# Altium PCB Rackmount_DSP.PcbDoc (part 24 of 24)
Units mil, origin at the board's own origin, x right, y up, seen from the top; angles counter-clockwise.
Board outline 10629.92 x 8267.72 mil, 4 copper layers (Top Layer, Mid Layer 1, Mid Layer 2, Bottom Layer), stack 36.2 mil thick; 4500 components, 1565 nets, 9765 pads, 3289 vias.
Unrouted connection lines stored in the file: 1.
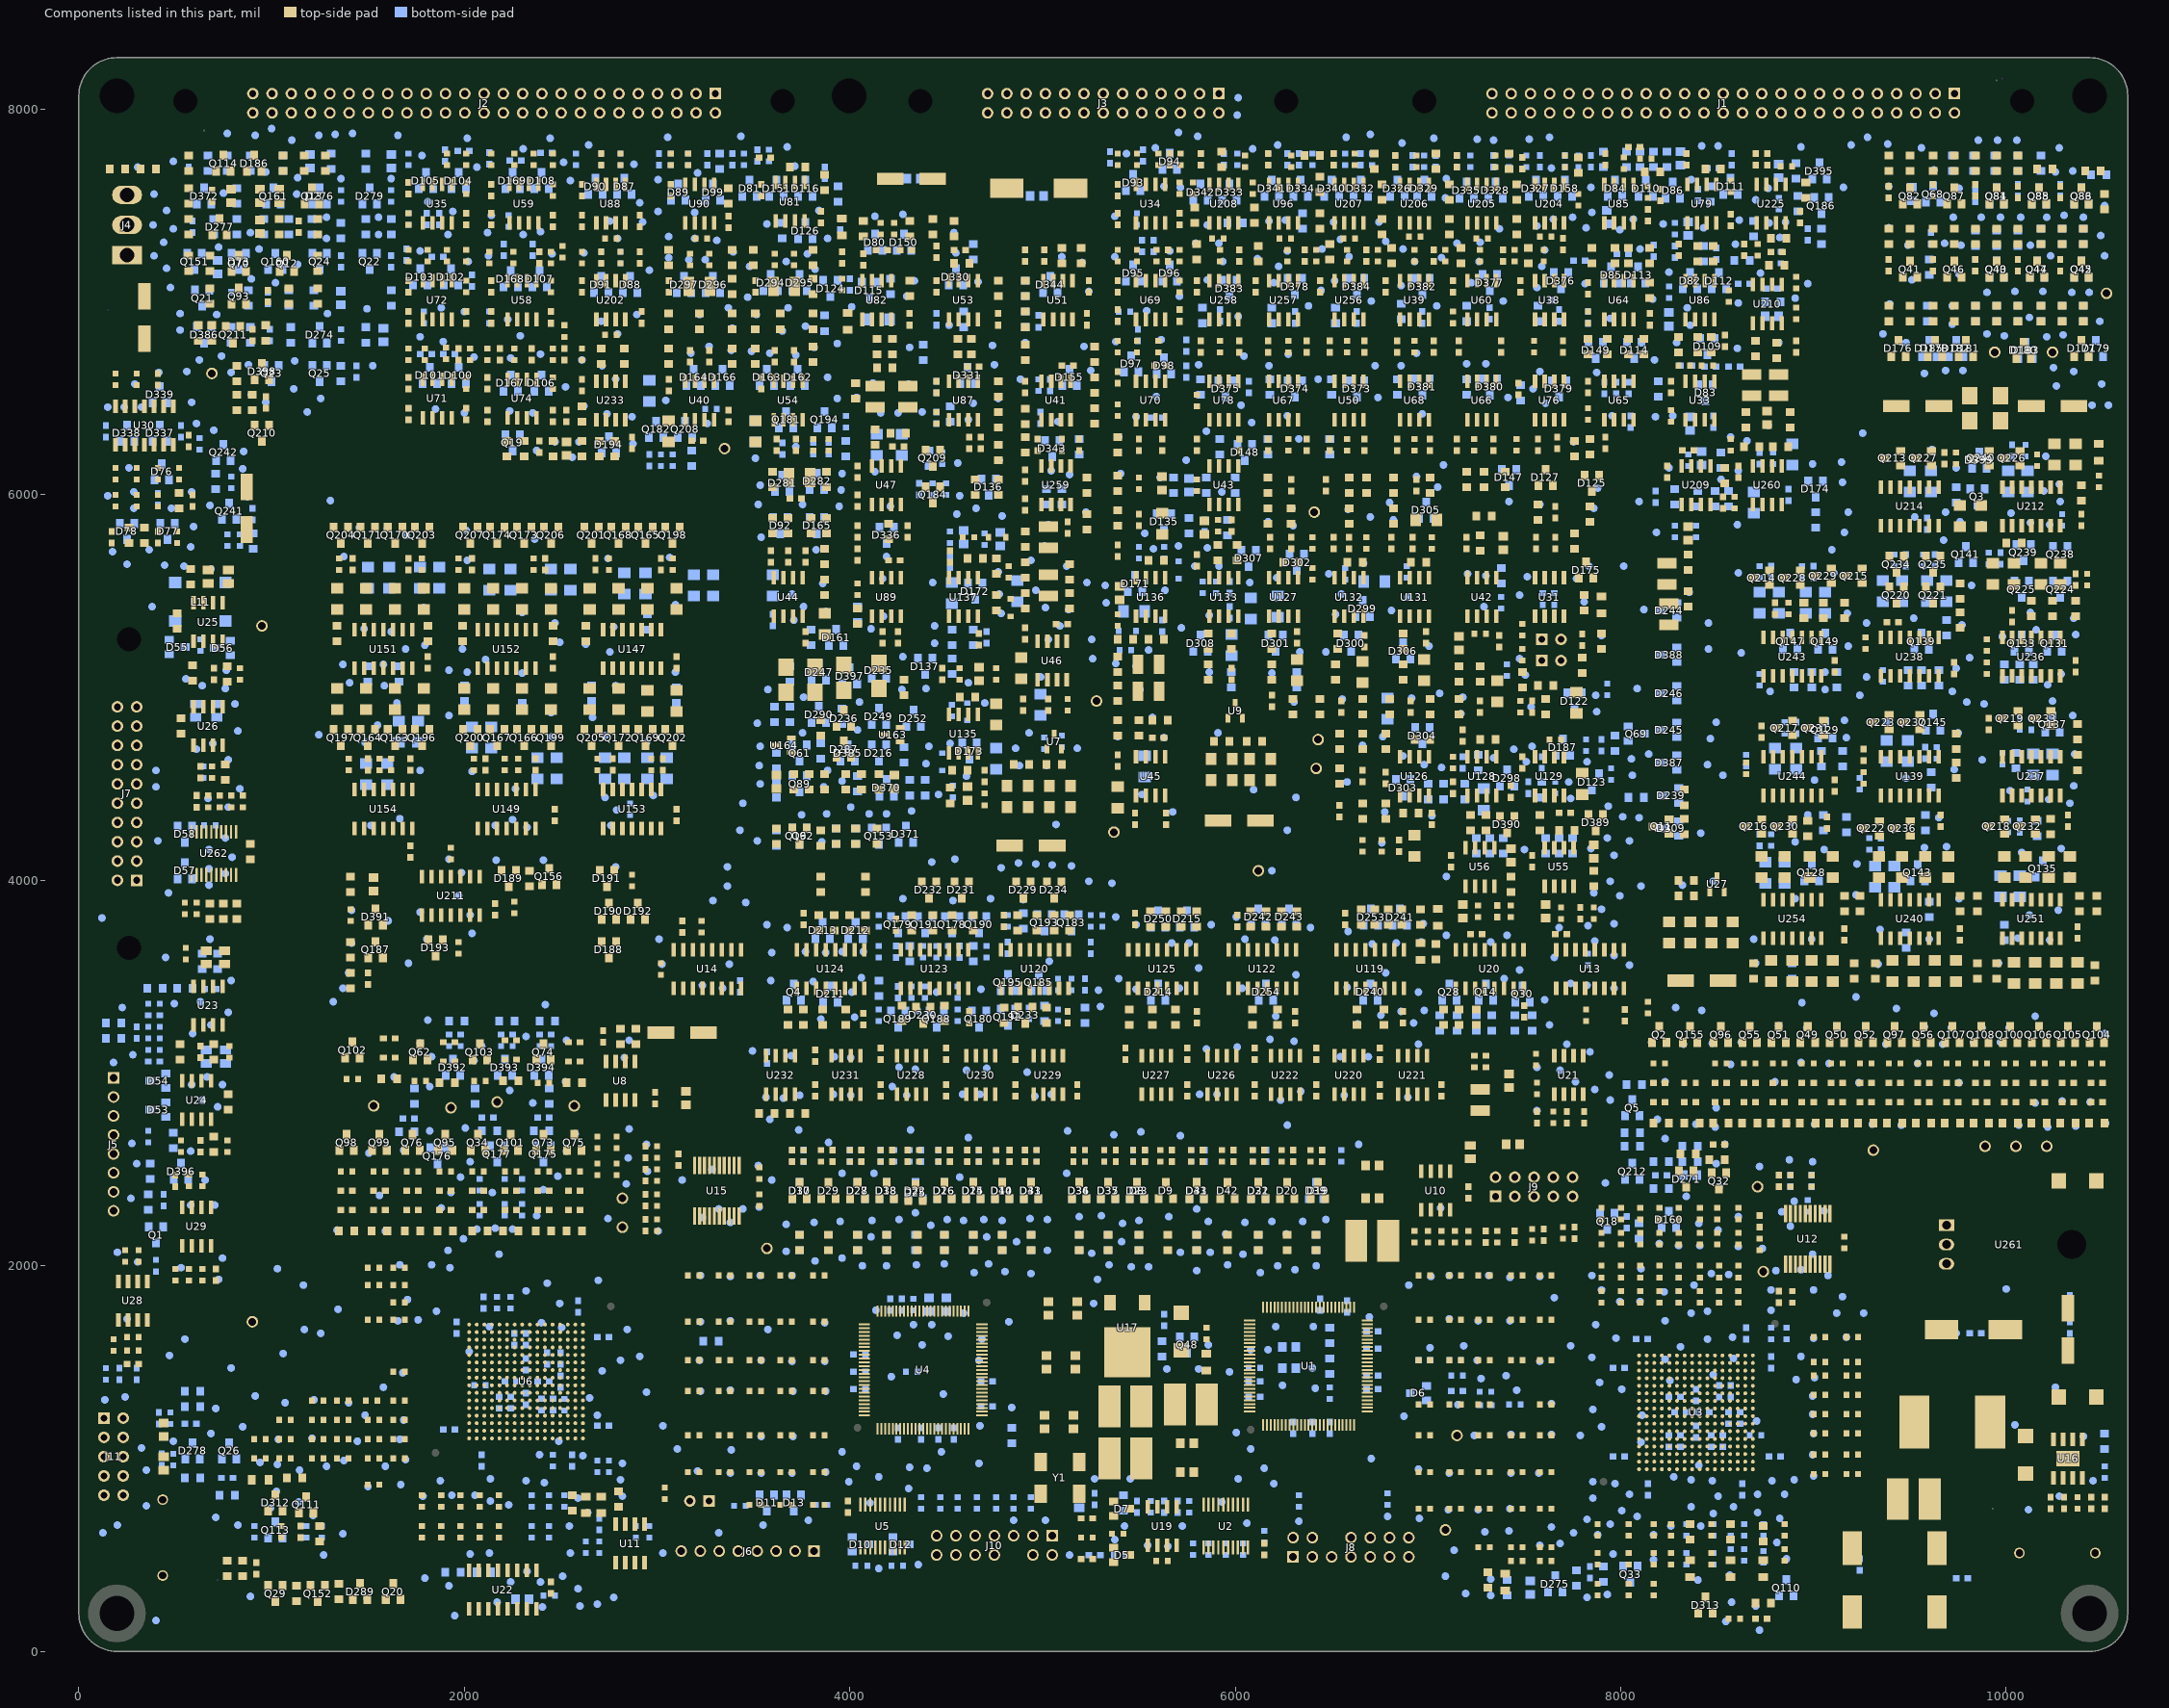
[diagram p26: the components of this part, seen from the top]

## Polygon pours and split planes (outlines as drawn) (continued)
VCC15+ on Mid Layer 2 "Mid Layer 2-VCC15+ 3" (solid, remove dead copper, pour order 67): 200 vertices, not listed, extent 140,3300 9000,7880
VCC15- on Mid Layer 2 "Mid Layer 2-VCC15-" (solid, remove dead copper, pour order 60): 5560,4080 5620,4020 6940,4020 7220,4300 7580,4300 7640,4240 7640,4120 7720,4040 8620,4040 8640,4020 8640,3600 8040,3000 3500,3000 3460,3040 3460,3140 3480,3160 7280,3160 7360,3240 8060,3240 8280,3460 8280,3780 8180,3880 5460,3880 5460,4100 5560,4100
VCC15- on Mid Layer 2 "Mid Layer 2-VCC15- 1" (solid, remove dead copper, pour order 66): 211 vertices, not listed, extent 1580,3880 9180,8160
+5V on Mid Layer 2 "Mid Layer 2-+5V" (solid, remove dead copper, pour order 61): 3080,3580 8220,3580 8240,3560 8240,3460 8040,3260 7360,3260 7280,3180 3060,3180 3020,3220 3020,3520
+5V on Mid Layer 2 "Mid Layer 2-+5V 1" (solid, remove dead copper, pour order 64): 940,7340 960,7320 960,7045 955,7040 725,7040 700,7015 700,6860 1160,6400 1160,2590 1150,2580 370,2580 360,2590 360,2870 370,2880 520,2880 530,2890 530,3260 520,3270 110,3270 100,3280 100,6680 140,6720 600,6720 620,6740 620,6980 560,7040 560,7300 600,7340
-5V on Mid Layer 2 "Mid Layer 2--5V" (solid, remove dead copper, pour order 58): 8240,3620 8260,3640 8260,3760 8160,3860 3080,3860 3020,3800 3020,3660 3060,3620
+1.8V on Mid Layer 2 "Mid Layer 2-+1.8V" (solid, remove dead copper, pour order 59): 4080,1520 4160,1520 4180,1500 4180,1410 4170,1400 4120,1400 4100,1380 4100,1300 4120,1280 4290,1280 4310,1260 4310,1190 4330,1170 4490,1170 4510,1190 4510,1330 4530,1350 5300,1350 5320,1330 5320,820 5350,790 5470,790 5630,950 5630,1120 5620,1130 5570,1130 5560,1140 5560,1360 5570,1370 6190,1370 6260,1300 6260,1220 6280,1200 6340,1200 6350,1210 6350,1290 6370,1310 6430,1310 6440,1300 6440,1210 6460,1190 6540,1190 6560,1210 6560,1400 6580,1420 6670,1420 6690,1440 6690,1590 6670,1610 6520,1610 6500,1630 6500,1730 6470,1760 6070,1760 5960,1650 5780,1650 5690,1740 5370,1740 5190,1920 4280,1920 4240,1880 4240,1670 4230,1660 4080,1660 4060,1640 4060,1540
GND on Bottom Layer "Bottom Layer-GND" (solid, remove dead copper, pour order 69): 9040,7840 9040,6080 8360,6080 8360,3280 7840,2760 3280,2760 3280,6040 3240,6080 2365,6080 2320,6125 2320,6160 1680,6160 1680,7800 3700,7800 3780,7720 4220,7720 4240,7700 4240,7440 4600,7440 4640,7400 4640,7280 4680,7240 5240,7240 5280,7280 5280,8120 5920,8120 5920,7920 8960,7920
GND on Bottom Layer "Bottom Layer-GND 1" (solid, remove dead copper, pour order 37): 4900,7740 4900,7340 4880,7320 4720,7320 4700,7340 4700,7740 4720,7760 4880,7760
GND on Bottom Layer "Bottom Layer-GND 2" (solid, remove dead copper, pour order 63): 9020,100 9060,60 9830,60 10100,330 10100,650 10170,720 10560,720 10580,740 10580,2300 10540,2340 9660,2340 9540,2220 9540,1260 9360,1080 9360,900 9300,840 9040,840 9020,820
VCC15+ on Bottom Layer "Bottom Layer-VCC15+" (solid, remove dead copper, pour order 32): 5040,7760 5040,7360 5080,7320 5140,7320 5220,7400 5220,7760 5200,7780 5060,7780
VCC15- on Bottom Layer "Bottom Layer-VCC15-" (solid, remove dead copper, pour order 25): 4400,7800 4400,7540 4440,7500 4560,7500 4580,7520 4580,7800 4560,7820 4420,7820
PGND on Bottom Layer "Bottom Layer-PGND" (solid, remove dead copper, pour order 49): 110,430 470,430 500,400 500,130 430,60 120,60 60,120 60,380
PGND on Bottom Layer "Bottom Layer-PGND 1" (solid, remove dead copper, pour order 45): 10390,410 10390,520 10430,560 10560,560 10580,540 10580,140 10480,40 10320,40 10280,80 10280,300

## Other copper
Top Layer:
  region net PGND: 420,230 450,230 450,400 420,400
  region net PGND: 10450,420 10480,420 10480,520 10450,520
Mid Layer 1:
  pour cut-out: 3772.98,8045 ccw(c3650,8045) 3650,8167.98 ccw(c3650,8045) 3527.02,8045 ccw(c3650,8045) 3650,7922.02 ccw(c3650,8045)
  pour cut-out: 4487.98,8040 ccw(c4365,8040) 4365,8162.98 ccw(c4365,8040) 4242.02,8040 ccw(c4365,8040) 4365,7917.02 ccw(c4365,8040)
  pour cut-out: 4165,8070 ccw(c4000,8070) 4000,8235 ccw(c4000,8070) 3835,8070 ccw(c4000,8070) 4000,7905 ccw(c4000,8070)
  pour cut-out: 6387.98,8035 ccw(c6265,8035) 6265,8157.98 ccw(c6265,8035) 6142.02,8035 ccw(c6265,8035) 6265,7912.02 ccw(c6265,8035)
  pour cut-out: 7107.98,8040 ccw(c6985,8040) 6985,8162.98 ccw(c6985,8040) 6862.02,8040 ccw(c6985,8040) 6985,7917.02 ccw(c6985,8040)
  pour cut-out: 382.98,5245 ccw(c260,5245) 260,5367.98 ccw(c260,5245) 137.02,5245 ccw(c260,5245) 260,5122.02 ccw(c260,5245)
  pour cut-out: 382.98,3650 ccw(c260,3650) 260,3772.98 ccw(c260,3650) 137.02,3650 ccw(c260,3650) 260,3527.02 ccw(c260,3650)
Mid Layer 2:
  pour cut-out: 4197.99,8060 ccw(c4000,8060) 4000,8257.99 ccw(c4000,8060) 3802.01,8060 ccw(c4000,8060) 4000,7862.01 ccw(c4000,8060)
Bottom Layer:
  pour cut-out: 9190,380 9280,380 9280,530 9190,530
  pour cut-out: 9700,340 9840,340 9840,420 9700,420

## Silkscreen, mask and mechanical layers (free items; w line width, h text height)
Top Overlay:
  drawing of 158 lines, arcs and shapes, not listed
  text "H2" at 10498.44,7882.5 h50
  text "H4" at 79.58,7842.5 h50
  text "H3" at 3985.94,7780 h50
  text "INV" at 1617.15,7745 h70
  text "REC" at 9107.11,7740 h70
  text "-15V" at 18.07,7652.5 h40
  text "+15V" at 51.33,7075 h50
  text "GND" at 10551.33,6874.91 h35 r90
  text "GND" at 3320,6115 h35
  text "BAT NUM" at 7969.7,5051.37 h35
  text "J16" at 8194.89,5051.37 h35
  text "J17" at 8304.89,5051.37 h35
  text "15" at 8101.56,4981.37 h35
  text "**" at 8313.66,4968.87 h50
  text "**" at 8206.16,4966.37 h50
  text "---" at 8306.11,4901.37 h35
  text "16" at 8116.56,4898.87 h35
  text "**" at 8208.66,4891.37 h50
  text "18" at 8116.56,4818.87 h35
  text "17" at 8019.06,4816.37 h35
  text "---" at 8203.61,4816.37 h35
  text "**" at 8313.66,4808.87 h50
  text "---" at 8201.11,4746.37 h35
  text "---" at 8308.61,4743.87 h35
  text "20" at 8114.67,4738.87 h35
  text "19" at 8019.06,4736.37 h35
  text "PARALLEL" at 503.4,4306.65 h35 r90
  text "REC JTAG" at 7718.77,2537.27 h35
  text "GND" at 9270,2475 h30
  text "MONITOR" at 363.4,2409.99 h35 r90
  text "GND" at 845,1585 h35
  text "SERVICE" at 3168.72,677.27 h35
  text "INV JTAG" at 82.08,627.27 h35
  text "INV_B" at 2628.4,420.37 h35 r90
  text "INV_A" at 2713.4,413.86 h35 r90
  text "H5" at 140.94,412.5 h50
  text "INV DSP JTAG" at 4629.14,362.27 h35
  text "REC DSP JTAG" at 6530.67,362.27 h35
  text "REC_A" at 8663.63,341.06 h35 r90
  text "DEBUG" at 3389.24,332.27 h35
  text "H1" at 10083.64,182.5 h50
  text "REC_B" at 8298.63,177.57 h35 r90
  text "BAR CODE" at 6074.95,157.5 h60
  text "IV0050U3" at 2870,125 h100
Bottom Overlay:
  region: 7835,7945 7816.25,7907.5 7846.25,7907.5
  region: 8830,7937.5 8811.25,7900 8841.25,7900
  region: 2402.5,7946 2383.75,7908.5 2413.75,7908.5
  region: 1405.53,7943.32 1386.78,7905.82 1416.78,7905.82
  lines w4: 255,3130 275,3150 ; 2375,1435 2380,1430 2380,1485 ; 2380,1205 2390,1215 2390,1160 ; 3915,6175 3950,6140 4005,6140 4020,6125 ; 4140,3700 4110,3700 4110,3535 4750,3535 4750,3700 4750,3875 4760,3895 4760,3940 4740,3960 ; 4325,3360 4325,3290 4355,3260 4355,3230 ; 8255,2590 8265,2580 8265,2700 ; 9465,5360 9530,5400 ; 9685,4685 9675,4675 9730,4675 ; 9865,4330 9970,4330 9960,4340 ; 9865,7075 9880,7085 10085,7085 10090,7090 ; 9875,4560 10015,4560 10005,4550 ; 4235,3935 4735,3935 4735,4085 4235,4085 4235,3935
  lines w5: 4340,4400 4365,4340 ; 6410,7515 6430,7490 ; 8425,685 8445,670 ; 8485,770 8570,725 8570,695
  lines w6: 1386.25,7618.75 1406.25,7626.25 ; 1400,7320 1407.5,7300 ; 6982.5,1430 7030,1430 7075,1415 7080,1415 ; 7345,1392.5 7345,1522.5 ; 8132.5,1330 8145,1337.5 8215,1337.5 ; 8355,6600 8405,6635 ; 8432.5,1430 8447.5,1417.5 8447.5,1277.5 ; 8510,1417.5 8525,1432.5 8525,1492.5 ; 8520,5335 8660,5335 8645,5350 ; 8770,7620 8805,7585 ; 8895,5540 8910,5525 ; 8895,7400 8895,7435 ; 10285,6787.5 10285,6857.5
Top Solder:
  region: 9860,1920 10460,1920 10460,2300 9860,2300
Top Assembly:
  region: 7665,683.64 7710,706.14 7710,661.14
  region: 8055.35,683.64 8010.35,661.14 8010.35,706.14
  lines w8: 7665,663.64 7665,935 ; 7687.5,683.64 7707.73,683.64 ; 8012.62,683.64 8032.85,683.64 ; 8055.35,663.64 8055.35,885.35
  text "9.91mm" at 7736.47,658.64 h50
Manufacture_Dimension:
  region: -443.15,0 -465.59,44.88 -420.71,44.88
  region: -443.15,8267.72 -420.71,8222.84 -465.59,8222.84
  region: 0,8858.27 44.88,8880.71 44.88,8835.83
  region: 10629.92,8858.27 10585.04,8835.83 10585.04,8880.71
  region: -1141.73,8464.57 -1119.29,8419.68 -1164.17,8419.68
  region: -1141.73,-196.85 -1164.17,-151.97 -1119.29,-151.97
  region: 10336.79,8436.94 10288.98,8452.18 10320.3,8484.33
  lines w7.87: -1161.81,-196.85 373.62,-196.85 ; -1161.81,8464.57 373.62,8464.57 ; -1141.73,-174.41 -1141.73,2962.52 ; -1141.73,5305.2 -1141.73,8442.13 ; -463.23,0 176.77,0 ; -463.23,8267.72 176.77,8267.72 ; -443.15,22.44 -443.15,3734.23 ; -443.15,4533.49 -443.15,8245.28 ; 0,8090.94 0,8878.35 ; 22.44,8858.27 4143.62,8858.27 ; 6486.3,8858.27 10607.48,8858.27 ; 10094.31,8673.16 10320.72,8452.6 ; 10629.92,8090.94 10629.92,8878.35
  text "270mm +0.2 - 0.2" at 4220.52,8779.53 h157.48
  text "R 5mm" at 9403.21,8594.42 h157.48
  text "ALL-" at 8895.67,8582.68 h157.48
  text "210mm" at -364.41,3817.3 h157.48 r90
  text "220mm +0.2 - 0.2" at -1062.99,3039.42 h157.48 r90
Board_Standard:
  drawing of 394 lines, arcs and shapes, not listed
  text "V-CUT" at 476.38,8300 h60
  text "V-CUT" at 346.38,-160 h60
  text "A00" at 5762.54,-1101.1 h100
  text "******" at 6446.35,-1113.6 h100
  text "IV0050U3" at 8645.55,-1201.1 h150
  text "Rev" at 5766.15,-1301.1 h100
  text "Modify No:" at 6348.86,-1301.1 h100
  text "Date" at 7331.91,-1301.1 h100
  text "IV0050U3 JY" at 10795.35,-1301.1 h150
  text "Technical Specification" at 7999.07,-1451.1 h150
  text "Designer" at 5599.63,-1676.1 h100
  text "Page" at 10427.9,-1676.1 h100
  text "02" at 11007.55,-1676.1 h100
  text "Of" at 11557.53,-1676.1 h100
  text "02" at 12057.55,-1676.1 h100
  text "Item Code" at 8721.7,-1701.1 h100
  text "Normalizer" at 5534.21,-1901.1 h100
  text "Approver" at 5580.66,-2076.1 h100
Technical_Specification:
  drawing of 347 lines, arcs and shapes, not listed
  text "1.GENERAL" at -14700,8920 h60
  text "a. Technical requirements are prioritized as follows:" at -14500,8820 h60
  text "1. First priority is given to this document;" at -14300,8720 h60
  text "2. Relevant contract documents agreed on by both parties;" at -14300,8620 h60
  text "3. The Bill Of General PCB Specification Document DMBM0.001.002G;" at -14300,8520 h60
  text "4. PCB general performance specification IPC-6012;" at -14300,8420 h60
  text "5. PCB acceptance specification IPC-A-600." at -14300,8320 h60
  text "b. Drill boards using drill data, drill pattern and hole schedule. Any conflict between the CAD data, the drawing," at -14500,8220 h60
  text "& the drill pattern shall be clarified with the design.authority before proceeding." at -14400,8120 h60
  text "c. Compensation and scaling may be applied by the PCB fabricator to allow for manufacturing process tolerances." at -14500,8020 h60
  text "d. All units of measure are in millimetres unless otherwise stated." at -14500,7920 h60
  text "2.ENGINEERING PROCESSING" at -14700,7720 h60
  text "a. If there isn't enough NPTH in the PCB for fabrication positioning, it is allowed to add NPTH positioning holes with diameter not greater than 3mm on the auxiliary process edges" at -14500,7620 h60
  text "(without affecting the SMT reference point) at the positions vacancies should be milled without break(which should be removed after finishing the PCB fabrication)." at -14400,7520 h60
  text "b. If positions vacancies should be milled without break (which should be removed after finishing the PCB fabrication)in the PCB, current-hogging sheet copper may be added there." at -14500,7420 h60
  text "c. When fabricating multi-layer PCBs, if auxiliary process edge exits, it is allowed to add choked-flow pieces (inner layer) and auxiliary electroplate pieces (outer layer) there." at -14500,7320 h60
  text "d. To ensure the size of the PCB with process edges,when milling troughs,the milling cutter milling in dummg strip a half of milling cutter diameter is permitted." at -14500,7220 h60
  text "e. The via without soldermask window should be treated as plugged." at -14500,7120 h60
  text "f. All for detail of those items beginning with \"#\" ,please refer to DMBM0.001.002G of Emerson Network Power Co.,Ltd." at -14500,7020 h60
  text "3.PARAMETERS" at -14700,6820 h60
  text "PCB Name:  IV0050U3" at -14500,6720 h60
  text "SPEll:  1  X  1" at -12800,6720 h60
  text "# PCB Material:(LM001)" at -11100,6720 h60
  text "# TG: (TG001)" at -9400,6720 h60
  text "Silkscreen color: WHITE" at -14500,6620 h60
  text "Electrical test: YES" at -12800,6620 h60
  text "# Surface Finishing: (PF003)" at -11100,6620 h60
  text "# CTI: (CTI001)" at -9400,6620 h60
  text "Blind or Buried via: NO" at -14500,6520 h60
  text "Plate at board edge:NO" at -12800,6520 h60
  text "# Soldermask Color: (SM001)" at -11100,6520 h60
  text "# SILKSCREEN MARK: (SS002)" at -9400,6520 h60
  text "V - CUT: YES" at -14500,6420 h60
  text "Gold finger: NO" at -12800,6420 h60
  text "# Green Technology: (GT002)" at -11100,6420 h60
  text "Copper thickness of plated via,though hole or edge >= 25um" at -14500,6320 h60
  text "4.VIEW" at -14700,6120 h60
  text "Arrangement of layers" at -14200,5920 h60
  text "(Dielectric strength: 2KV)" at -13300,5920 h60
  text "Width:" at -10674.04,5899.82 h60
  text "0.5mm" at -10425,5895 h60
  text "+/-0.15mm" at -10425,5820 h60
  text "TOP" at -14300,5720 h60
  text "1OZ" at -12600,5720 h60
  text "45" at -10980.88,5692.75 h60
  text "Core/Pre-preg >=0.4mm" at -13775,5620 h60
  text "+/-0.15mm" at -10675,5545 h60
  text "L2_INNER" at -14300,5520 h60
  text "1OZ" at -12600,5520 h60
  text "Core/Pre-preg >=0.4mm" at -13775,5420 h60
  text "L3_INNER" at -14300,5320 h60
  text "1OZ" at -12600,5320 h60
  text "Figure 2: V-CUT" at -10800,5320 h60
  text "Core/Pre-preg >=0.4mm" at -13775,5220 h60
  text "BOTTOM" at -14300,5120 h60
  text "1OZ" at -12600,5120 h60
  text "FINISHED BOARD THICKNESS:" at -14200,4920 h60
  text "2.0mm +/-0.18mm" at -13000,4920 h60
  text "Figure 1: Arrangement of layers" at -13900,4720 h60
  text "LAYER" at -14400,4470 h60
  text "Gerber files" at -13500,4470 h60
  text "NOTES" at -12400,4470 h60
  text "TOP" at -14400,4320 h60
  text "EtchLayer1Top.gdo" at -13500,4320 h60
  text "Positive" at -12400,4320 h60
  text "L2_INNER" at -14400,4220 h60
  text "EtchLayer2.gdo" at -13500,4220 h60
  text "Positive" at -12400,4220 h60
  text "L3_INNER" at -14400,4120 h60
  text "EtchLayer3.gdo" at -13500,4120 h60
  text "Positive" at -12400,4120 h60
  text "BOTTOM" at -14400,4020 h60
  text "EtchLayer4Bottom.gdo" at -13500,4020 h60
  text "Positive" at -12400,4020 h60
  text "SilkscreenTop" at -14400,3920 h60
  text "SilkscreenTop.gdo" at -13500,3920 h60
  text "Positive" at -12400,3920 h60
  text "SilkscreenBottom" at -14400,3820 h60
  text "SilkscreenBottom.gdo" at -13500,3820 h60
  text "Positive" at -12400,3820 h60
  text "SoldermaskTop" at -14400,3720 h60
  text "SoldermaskTop.gdo" at -13500,3720 h60
  text "Negative" at -12400,3720 h60
  text "SoldermaskBottom" at -14400,3620 h60
  text "SoldermaskBottom.gdo" at -13500,3620 h60
  text "Negative" at -12400,3620 h60
  text "DrillDrawingThrough" at -14400,3520 h60
  text "DrillDrawingThrough.gdo" at -13500,3520 h60
  text "TechnicalSpecification" at -14400,3420 h60
  text "TechnicalSpecification.gdo" at -13500,3420 h60
  text "NC DRILL" at -14400,3320 h60
  text "Thruholeplated.ncd" at -13500,3320 h60
  text "DRILL" at -12400,3320 h60
  text "Thruholenonplate.ncd" at -13500,3220 h60
  text "DRILL" at -12400,3220 h60
  text "ContourPlated.ncd" at -13500,3120 h60
  text "DRILL" at -12400,3120 h60
  text "ContourNonPlated.ncd" at -13500,3020 h60
  text "DRILL" at -12400,3020 h60
  text "Table 1: Definition of layers" at -13700,2820 h60
  text "A00" at -14482.81,-1050 h100
  text "********" at -13864.6,-1050 h100
  text "IV0050U3" at -11589.8,-1125 h150
  text "Rev" at -14479.2,-1250 h100
  text "Modify No:" at -13896.49,-1250 h100
  text "Date" at -12913.44,-1250 h100
  text "IV0050U3 JY" at -9450,-1275 h150
  text "Technical Specification" at -12246.28,-1425 h150
  text "Designer" at -14645.72,-1625 h100
  text "Item Code" at -11473.65,-1650 h100
  text "Page" at -9817.46,-1650 h100
  text "01" at -9232.39,-1650 h100
  text "Of" at -8687.83,-1650 h100
  text "02" at -8187.8,-1650 h100
  text "Normalizer" at -14711.14,-1825 h100
  text "Approver" at -14664.69,-2025 h100
Unnamed user layer:
  lines w1: -180.72,5160.65 10728.09,5160.65 ; -50.8,4534.73 10858.01,4534.73 ; -46.08,7795.37 10938.33,7795.37 ; -15.36,6517.61 10893.45,6517.61 ; -15.36,7021.21 10893.45,7021.21 ; 0,7534.25 10984.41,7534.25 ; 0.4,6049.45 10909.21,6049.45 ; 66.96,5470.89 10975.77,5470.89 ; 148.88,2712.02 11057.69,2712.02 ; 394.64,3797.45 11303.45,3797.45 ; 5664.72,702.56 5664.72,11611.37 ; 2769.9,901.11 3527.65,901.11 3527.65,1039.35 2769.9,1039.35 2769.9,901.11 ; 4764.12,1169.91 4922.84,1169.91 4922.84,1848.31 4764.12,1848.31 4764.12,1169.91 ; 6691.79,6927.31 6835.15,6927.31 6835.15,7080.91 6691.79,7080.91 6691.79,6927.31 ; 6717.39,721.91 7475.14,721.91 7475.14,860.15 6717.39,860.15 6717.39,721.91 ; 6722.51,1510.39 7480.26,1510.39 7480.26,1648.63 6722.51,1648.63 6722.51,1510.39 ; 6722.51,1704.95 7480.26,1704.95 7480.26,1843.19 6722.51,1843.19 6722.51,1704.95 ; 6732.75,1315.83 7490.5,1315.83 7490.5,1454.07 6732.75,1454.07 6732.75,1315.83 ; 6737.87,1121.27 7495.62,1121.27 7495.62,1259.51 6737.87,1259.51 6737.87,1121.27 ; 6742.99,921.59 7500.74,921.59 7500.74,1059.83 6742.99,1059.83 6742.99,921.59 ; 7379.28,748.08 7521.22,748.08 7521.22,8181.7 7379.28,8181.7 7379.28,748.08
  lines w9.84: 5314.96,0 5314.96,8818.9 ; 8086.96,-428.4 8086.96,8390.5 ; 10575.26,-546.16 10575.26,8272.74 ; -143.15,196.85 cw(c196.85,196.85) 196.85,536.85 cw(c196.85,196.85) 536.85,196.85 cw(c196.85,196.85) 196.85,-143.15 cw(c196.85,196.85) -143.15,196.85 ; -143.15,8070.87 cw(c196.85,8070.87) 196.85,8410.87 cw(c196.85,8070.87) 536.85,8070.87 cw(c196.85,8070.87) 196.85,7730.87 cw(c196.85,8070.87) -143.15,8070.87 ; 3656.06,8070.87 cw(c3996.06,8070.87) 3996.06,8410.87 cw(c3996.06,8070.87) 4336.06,8070.87 cw(c3996.06,8070.87) 3996.06,7730.87 cw(c3996.06,8070.87) 3656.06,8070.87 ; 8478.19,4788 9021.6,4788 9021.6,7684.57 8478.19,7684.57 8478.19,4788 ; 9032.59,7133.77 9272.59,7133.77 9272.59,7373.77 9032.59,7373.77 9032.59,7133.77 ; 10093.07,196.85 cw(c10433.07,196.85) 10433.07,536.85 cw(c10433.07,196.85) 10773.07,196.85 cw(c10433.07,196.85) 10433.07,-143.15 cw(c10433.07,196.85) 10093.07,196.85 ; 10093.07,8070.87 cw(c10433.07,8070.87) 10433.07,8410.87 cw(c10433.07,8070.87) 10773.07,8070.87 cw(c10433.07,8070.87) 10433.07,7730.87 cw(c10433.07,8070.87) 10093.07,8070.87
Drill Drawing:
  drawing of 275 lines, arcs and shapes, not listed
  text "Through Holes" at 2526.66,-325 h50
  text "Symbol" at 394.72,-525 h50
  text "Diameter (in)" at 934.97,-525 h50
  text "Tolerance (in)" at 1809.24,-525 h50
  text "Plated" at 2694.92,-525 h50
  text "Punched" at 3219.14,-525 h50
  text "Hole Name" at 3975.7,-525 h50
  text "Quantity" at 4846.22,-525 h50
  text "0.0120" at 1098.4,-725 h50
  text "Yes" at 2768.67,-725 h50
  text "No" at 3343.91,-725 h50
  text "Rnd 12" at 4049.67,-725 h50
  text "146" at 4969.25,-725 h50
  text "0.0160" at 1098.4,-825 h50
  text "Yes" at 2768.67,-825 h50
  text "No" at 3343.91,-825 h50
  text "Rnd 16" at 4049.67,-825 h50
  text "3143" at 4944.3,-825 h50
  text "0.0360" at 1097.63,-925 h50
  text "Yes" at 2768.67,-925 h50
  text "No" at 3343.91,-925 h50
  text "Rnd 36" at 4048.9,-925 h50
  text "172" at 4969.25,-925 h50
  text "0.0380" at 1097.83,-1025 h50
  text "Yes" at 2768.67,-1025 h50
  text "No" at 3343.91,-1025 h50
  text "Rnd 38" at 4049.1,-1025 h50
  text "4" at 5020,-1025 h50
  text "0.0400" at 1097.63,-1125 h50
  text "Yes" at 2768.67,-1125 h50
  text "No" at 3343.91,-1125 h50
  text "Rnd 40" at 4048.9,-1125 h50
  text "70" at 4993.88,-1125 h50
  text "0.0450" at 1097.63,-1225 h50
  text "Yes" at 2768.67,-1225 h50
  text "No" at 3343.91,-1225 h50
  text "Rnd 45" at 4048.9,-1225 h50
  text "3" at 5020,-1225 h50
  text "0.0750" at 1097.63,-1325 h50
  text "Yes" at 2768.67,-1325 h50
  text "No" at 3343.91,-1325 h50
  text "Rnd 75" at 4048.9,-1325 h50
  text "3" at 5020,-1325 h50
  text "0.1800" at 1098.59,-1425 h50
  text "Yes" at 2768.67,-1425 h50
  text "No" at 3343.91,-1425 h50
  text "Rnd 180" at 4025.17,-1425 h50
  text "2" at 5020,-1425 h50
  text "0.0010" at 1098.4,-1525 h50
  text "No" at 2793.91,-1525 h50
  text "No" at 3343.91,-1525 h50
  text "Rnd 1 Non-Plated" at 3810.04,-1525 h50
  text "2" at 5020,-1525 h50
  text "0.1250" at 1098.4,-1625 h50
  text "No" at 2793.91,-1625 h50
  text "No" at 3343.91,-1625 h50
  text "Rnd 125 Non-Plated" at 3760.52,-1625 h50
  text "8" at 5020,-1625 h50
  text "0.1500" at 1098.4,-1725 h50
  text "No" at 2793.91,-1725 h50
  text "No" at 3343.91,-1725 h50
  text "Rnd 150 Non-Plated" at 3760.52,-1725 h50
  text "1" at 5020,-1725 h50
  text "0.1800" at 1098.59,-1825 h50
  text "No" at 2793.91,-1825 h50
  text "No" at 3343.91,-1825 h50
  text "Rnd 180 Non-Plated" at 3760.74,-1825 h50
  text "3" at 5020,-1825 h50
  text "Don't drill the via of 0.001th diameter!" at 270,-2000 h50

## Text inside footprints (layer, text, board x,y; h text height)
J1: Top Overlay "49" at 6873.11,8126.5 h60 r180; Top Overlay "50" at 6873.11,8006.5 h60 r180; Top Overlay "2" at 10231.5,7966.5 h60 r180; Top Overlay "1" at 10231.5,8126.5 h60 r180; Top Overlay "60" at 6726.83,7990.16 h60 r180; Top Overlay "59" at 6726.83,8126.5 h60 r180
J2: Top Overlay "49" at 443.98,8126.5 h60 r180; Top Overlay "50" at 443.98,8006.5 h60 r180; Top Overlay "2" at 3858.58,7986.5 h60 r180; Top Overlay "1" at 3863.7,8111.61 h60 r180
J3: Top Overlay "1" at 6384.96,8111.5 h60 r180; Top Overlay "2" at 6384.96,7996.5 h60 r180; Top Overlay "25" at 4256.58,8116.5 h60 r180; Top Overlay "26" at 4256.58,8001.5 h60 r180
J4: Top Overlay "1" at 252.1,7134.97 h40.16 r90; Top Overlay "3" at 483.56,7660.4 h40.16 r90; Top Assembly "3" at 271.6,7685.4 h40.16 r90; Top Assembly "1" at 270.13,7119.97 h40.16 r90
J5: Top Overlay "1" at 198.53,3113.92 h40.16 r90; Top Overlay "8" at 163.05,2151.87 h40.16 r90; Top Assembly "8" at 193.05,2141.87 h40.16 r90; Top Assembly "1" at 198.53,3113.92 h40.16 r90
J6: Top Overlay "1" at 3953.92,501.47 h40.16; Top Overlay "8" at 2981.87,506.95 h40.16; Top Assembly "8" at 2981.87,506.95 h40.16; Top Assembly "1" at 3953.92,501.47 h40.16
J7: Top Overlay "20" at 220,5363.38 h60 r90; Top Overlay "19" at 340,5363.38 h60 r90; Top Overlay "1" at 340,3510 h60 r90; Top Overlay "2" at 220,3510 h60 r90
J8: Top Overlay "1" at 6206.58,463.75 h40.16; Top Overlay "2" at 6211.28,562.76 h40.16; Top Overlay "13" at 6977.99,464.76 h40.16; Top Overlay "14" at 6974.93,569.17 h40.16; Top Assembly "14" at 6974.93,569.17 h40.16; Top Assembly "13" at 6977.99,464.76 h40.16; Top Assembly "1" at 6206.58,463.75 h40.16; Top Assembly "2" at 6211.28,562.76 h40.16
J9: Top Overlay "2" at 7268.29,2431.06 h40.16; Top Overlay "9" at 7841.53,2332.39 h40.16; Top Overlay "10" at 7823.58,2445.08 h40.16; Top Overlay "1" at 7275.71,2334.52 h40.16; Top Assembly "10" at 7823.58,2443.11 h40.16; Top Assembly "9" at 7841.53,2330.42 h40.16; Top Assembly "2" at 7268.29,2429.09 h40.16; Top Assembly "1" at 7265.71,2332.55 h40.16
J10: Top Overlay "1" at 5143.42,626.25 h40.16 r180; Top Overlay "2" at 5138.72,527.24 h40.16 r180; Top Overlay "13" at 4372.01,625.24 h40.16 r180; Top Overlay "14" at 4375.07,520.83 h40.16 r180; Top Assembly "14" at 4375.07,520.83 h40.16 r180; Top Assembly "13" at 4372.01,625.24 h40.16 r180; Top Assembly "1" at 5143.42,626.25 h40.16 r180; Top Assembly "2" at 5138.72,527.24 h40.16 r180
J11: Top Overlay "1" at 104.52,1294.29 h40.16 r270; Top Overlay "2" at 201.06,1291.71 h40.16 r270; Top Assembly "10" at 213.11,736.42 h40.16 r270; Top Assembly "9" at 100.42,718.47 h40.16 r270; Top Assembly "2" at 199.09,1291.71 h40.16 r270; Top Assembly "1" at 102.55,1294.29 h40.16 r270
J12: Top Overlay "2" at 3092.57,800.69 h40.16 r180; Top Overlay "1" at 3354.2,800.16 h40.16 r180; Top Assembly "1" at 3356.17,802.13 h40.16 r180; Top Assembly "2" at 3094.54,802.66 h40.16 r180
J16: Top Assembly "1" at 7503.83,5117.87 h40.16; Top Assembly "2" at 7765.46,5117.34 h40.16
J17: Top Assembly "1" at 7503.83,5227.87 h40.16; Top Assembly "2" at 7765.46,5227.34 h40.16
U3: Top Overlay "A" at 8684.54,1604.45 h19.68 r270; Top Overlay "K" at 8322.49,1606.95 h19.68 r270; Top Overlay "L" at 8282.54,1601.96 h19.68 r270; Top Overlay "M" at 8242.59,1606.33 h19.68 r270; Top Overlay "N" at 8204.71,1604.45 h19.68 r270; Top Overlay "P" at 8166.63,1606.33 h19.68 r270; Top Overlay "R" at 8132.29,1602.58 h19.68 r270; Top Overlay "T" at 8092.54,1602.58 h19.68 r270; Top Overlay "H" at 8402.2,1604.45 h19.68 r270; Top Overlay "G" at 8443.4,1604.45 h19.68 r270; Top Overlay "F" at 8478.35,1601.54 h19.68 r270; Top Overlay "E" at 8518.53,1603.21 h19.68 r270; Top Overlay "D" at 8559.72,1603.21 h19.68 r270; Top Overlay "C" at 8601.75,1604.87 h19.68 r270; Top Overlay "B" at 8641.1,1602.79 h19.68 r270; Top Overlay "J" at 8359.75,1603.76 h19.68 r270; Top Overlay "1" at 8739.28,1547.21 h19.68 r270; Top Overlay "2" at 8739.28,1502.13 h19.68 r270; Top Overlay "3" at 8739.28,1462.65 h19.68 r270; Top Overlay "4" at 8739.28,1425.33 h19.68 r270; Top Overlay "5" at 8739.28,1384.69 h19.68 r270; Top Overlay "6" at 8739.28,1344.1 h19.68 r270; Top Overlay "7" at 8739.28,1309.77 h19.68 r270; Top Overlay "8" at 8739.28,1271.69 h19.68 r270; Top Overlay "10" at 8739.28,1209.8 h19.68 r270; Top Overlay "9" at 8739.28,1237.36 h19.68 r270; Top Overlay "11" at 8739.28,1164.23 h19.68 r270; Top Overlay "12" at 8739.28,1124.28 h19.68 r270; Top Overlay "13" at 8739.28,1084.52 h19.68 r270; Top Overlay "14" at 8739.28,1044.57 h19.68 r270; Top Overlay "16" at 8739.28,961.12 h19.68 r270; Top Overlay "15" at 8739.28,1008.37 h19.68 r270
U6: Top Overlay "A" at 2614.54,1764.45 h19.68 r270; Top Overlay "K" at 2252.49,1766.95 h19.68 r270; Top Overlay "L" at 2212.54,1761.96 h19.68 r270; Top Overlay "M" at 2172.59,1766.33 h19.68 r270; Top Overlay "N" at 2134.71,1764.45 h19.68 r270; Top Overlay "P" at 2096.63,1766.33 h19.68 r270; Top Overlay "R" at 2062.29,1762.58 h19.68 r270; Top Overlay "T" at 2022.54,1762.58 h19.68 r270; Top Overlay "H" at 2332.2,1764.45 h19.68 r270; Top Overlay "G" at 2373.4,1764.45 h19.68 r270; Top Overlay "F" at 2408.35,1761.54 h19.68 r270; Top Overlay "E" at 2448.53,1763.21 h19.68 r270; Top Overlay "D" at 2489.72,1763.21 h19.68 r270; Top Overlay "C" at 2531.75,1764.87 h19.68 r270; Top Overlay "B" at 2571.1,1762.79 h19.68 r270; Top Overlay "J" at 2289.75,1763.76 h19.68 r270; Top Overlay "1" at 2669.28,1707.21 h19.68 r270; Top Overlay "2" at 2669.28,1662.13 h19.68 r270; Top Overlay "3" at 2669.28,1622.65 h19.68 r270; Top Overlay "4" at 2669.28,1585.33 h19.68 r270; Top Overlay "5" at 2669.28,1544.69 h19.68 r270; Top Overlay "6" at 2669.28,1504.1 h19.68 r270; Top Overlay "7" at 2669.28,1469.77 h19.68 r270; Top Overlay "8" at 2669.28,1431.69 h19.68 r270; Top Overlay "10" at 2669.28,1369.8 h19.68 r270; Top Overlay "9" at 2669.28,1397.36 h19.68 r270; Top Overlay "11" at 2669.28,1324.23 h19.68 r270; Top Overlay "12" at 2669.28,1284.28 h19.68 r270; Top Overlay "13" at 2669.28,1244.52 h19.68 r270; Top Overlay "14" at 2669.28,1204.57 h19.68 r270; Top Overlay "16" at 2669.28,1121.12 h19.68 r270; Top Overlay "15" at 2669.28,1168.37 h19.68 r270